# EAGLE board Platine (EAGLE 6.6.0)
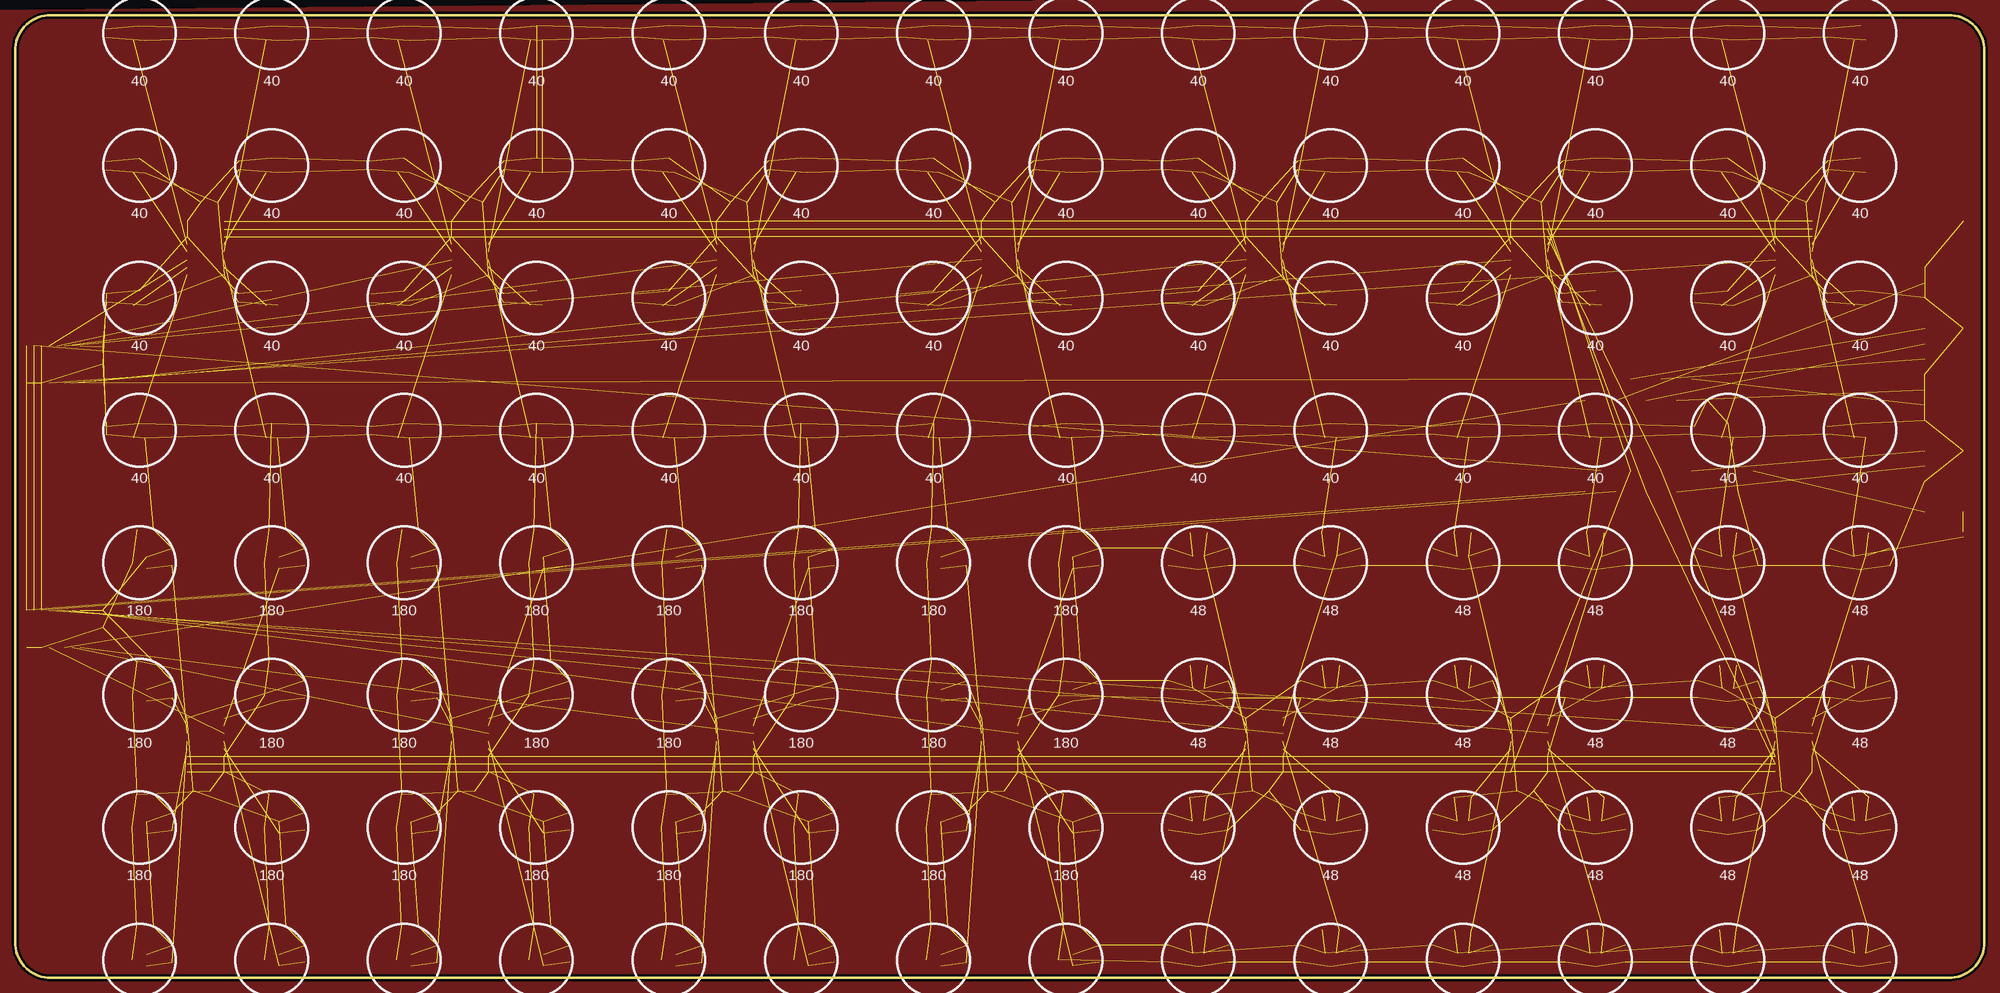
[diagram p0: board, top side]
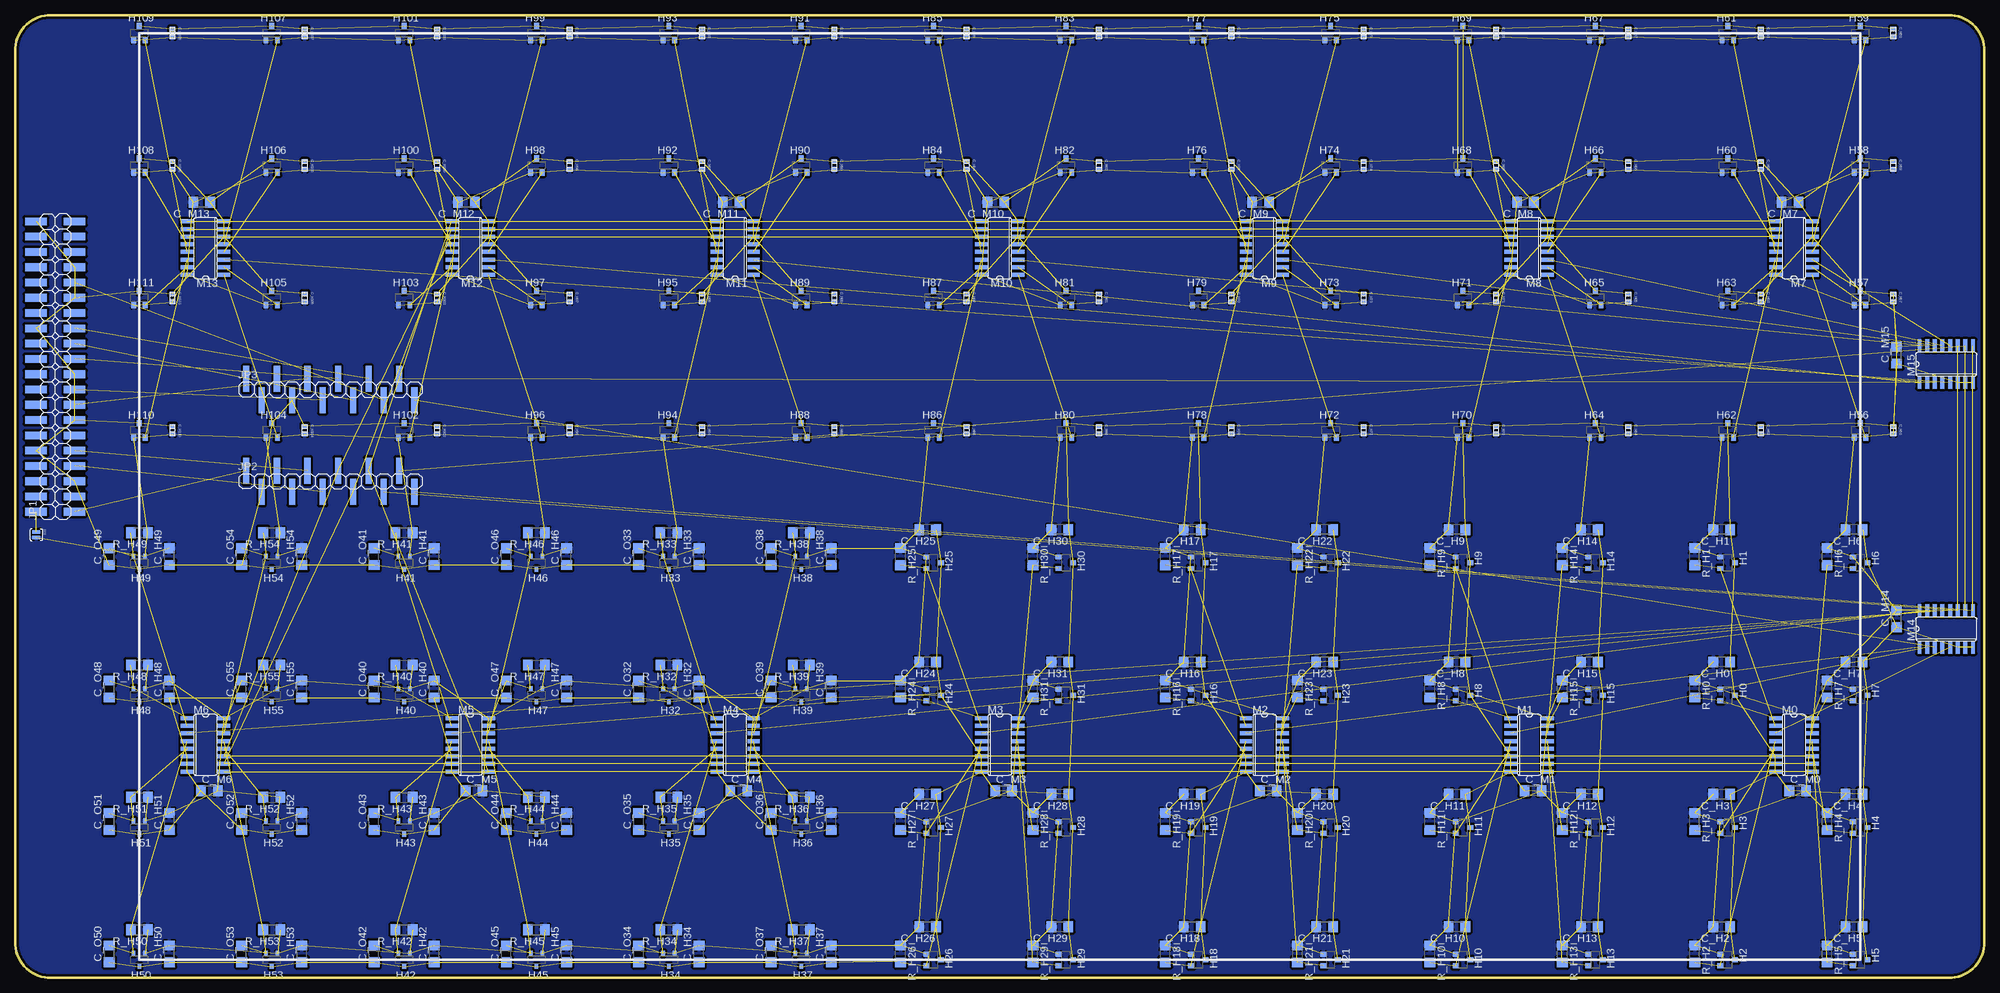
[diagram p1: board, bottom side, seen from below]

Size 327.37 x 160.02 mm. Coordinates in mm from the lower left corner, seen from the top.
Outline: 0,6 0,154.02 arc-90 6,160.02 321.37,160.02 arc-90 327.37,154.02 327.37,6 arc-90 321.37,0 6,0 arc-90 0,6
Copper layers (1*16): Top 0.035mm / dielectric 1.5mm / Bottom 0.035mm
Design rules "NOA Eagle Rule 2016-06-12": minimum track width 6mil, minimum drill 0.3mm, track to track 6mil, track to pad 6mil, pad to pad 6mil, via to via 6mil, smd to smd 0mil, copper to edge 0.4mm, drill to drill 10mil, minimum pad ring 10mil, minimum via ring 6mil, stop-mask expansion 2mil, vias tented up to drill 25mil, thermal gap 10mil
Net classes: 0 default: width 0.406 mm, clearance 0.178 mm

## Footprints (pad centres in the part's own frame; a part is rotated, then mirrored left to right if it is on the bottom)
C1206 = smd 1.6 x 1.8: 1 -1.4,0; 2 1.4,0
0603 = smd 0.66 x 0.965: 1 -0.699,0; 2 0.699,0
SC59 = smd 0.8 x 1: 1 -0.95,-1.2; 2 0,1.2; 3 0.95,-1.2
SOT23@1 = smd 0.6 x 0.8: 1 -0.95,-1.1; 2 0.95,-1.1; 3 0,1.1
SOT23F = smd 0.8 x 1: 1 -0.95,-1.2; 2 0.95,-1.2; 3 0,1.2
2X20SMD = smd 1.27 x 3.6: 1 0,-3.2; 2 0,3.2; 3 2.54,-3.2; 4 2.54,3.2; 5 5.08,-3.2; 6 5.08,3.2; 7 7.62,-3.2; 8 7.62,3.2; 9 10.16,-3.2; 10 10.16,3.2; 11 12.7,-3.2; 12 12.7,3.2; 13 15.24,-3.2; 14 15.24,3.2; 15 17.78,-3.2; 16 17.78,3.2; 17 20.32,-3.2; 18 20.32,3.2; 19 22.86,-3.2; 20 22.86,3.2; 21 25.4,-3.2; 22 25.4,3.2; 23 27.94,-3.2; 24 27.94,3.2; 25 30.48,-3.2; 26 30.48,3.2; 27 33.02,-3.2; 28 33.02,3.2; 29 35.56,-3.2; 30 35.56,3.2; 31 38.1,-3.2; 32 38.1,3.2; 33 40.64,-3.2; 34 40.64,3.2; 35 43.18,-3.2; 36 43.18,3.2; 37 45.72,-3.2; 38 45.72,3.2; 39 48.26,-3.2; 40 48.26,3.2
1X12SMD = smd 1.016 x 4.318: 1 -1.27,1.778; 2 1.27,-1.778; 3 3.81,1.778; 4 6.35,-1.778; 5 8.89,1.778; 6 11.43,-1.778; 7 13.97,1.778; 8 16.51,-1.778; 9 19.05,1.778; 10 21.59,-1.778; 11 24.13,1.778; 12 26.67,-1.778
SO16 = smd 0.66 x 2.032: 1 -4.445,-3.073; 2 -3.175,-3.073; 3 -1.905,-3.073; 4 -0.635,-3.073; 5 0.635,-3.073; 6 1.905,-3.073; 7 3.175,-3.073; 8 4.445,-3.073; 9 4.445,3.073; 10 3.175,3.073; 11 1.905,3.073; 12 0.635,3.073; 13 -0.635,3.073; 14 -1.905,3.073; 15 -3.175,3.073; 16 -4.445,3.073
R1206 = smd 1.6 x 1.803: 1 -1.422,0; 2 1.422,0
SJ_2S-NO = smd 0.635 x 1.27: 1 -0.45,0; 2 0.45,0

## Placement (x,y rotation side)
C_H0  100n  [C1206]  43.67,52.51 180 bottom
C_H1  100n  [C1206]  43.67,74.51 180 bottom
C_H2  100n  [C1206]  43.67,8.5 180 bottom
C_H3  100n  [C1206]  43.67,30.5 180 bottom
C_H4  100n  [C1206]  21.67,30.5 180 bottom
C_H5  100n  [C1206]  21.67,8.5 180 bottom
C_H6  100n  [C1206]  21.67,74.51 180 bottom
C_H7  100n  [C1206]  21.67,52.51 180 bottom
C_H8  100n  [C1206]  87.67,52.51 180 bottom
C_H9  100n  [C1206]  87.67,74.51 180 bottom
C_H10  100n  [C1206]  87.67,8.5 180 bottom
C_H11  100n  [C1206]  87.67,30.5 180 bottom
C_H12  100n  [C1206]  65.67,30.5 180 bottom
C_H13  100n  [C1206]  65.67,8.5 180 bottom
C_H14  100n  [C1206]  65.67,74.51 180 bottom
C_H15  100n  [C1206]  65.67,52.51 180 bottom
C_H16  100n  [C1206]  131.68,52.51 180 bottom
C_H17  100n  [C1206]  131.68,74.51 180 bottom
C_H18  100n  [C1206]  131.68,8.5 180 bottom
C_H19  100n  [C1206]  131.68,30.5 180 bottom
C_H20  100n  [C1206]  109.68,30.5 180 bottom
C_H21  100n  [C1206]  109.68,8.5 180 bottom
C_H22  100n  [C1206]  109.68,74.51 180 bottom
C_H23  100n  [C1206]  109.68,52.51 180 bottom
C_H24  100n  [C1206]  175.69,52.51 180 bottom
C_H25  100n  [C1206]  175.69,74.51 180 bottom
C_H26  100n  [C1206]  175.69,8.5 180 bottom
C_H27  100n  [C1206]  175.69,30.5 180 bottom
C_H28  100n  [C1206]  153.68,30.5 180 bottom
C_H29  100n  [C1206]  153.68,8.5 180 bottom
C_H30  100n  [C1206]  153.68,74.51 180 bottom
C_H31  100n  [C1206]  153.68,52.51 180 bottom
C_H32  10n  [C1206]  213.69,48.01 90 bottom
C_H33  10n  [C1206]  213.69,70.01 90 bottom
C_H34  10n  [C1206]  213.69,4 90 bottom
C_H35  10n  [C1206]  213.69,26 90 bottom
C_H36  10n  [C1206]  191.69,26 90 bottom
C_H37  10n  [C1206]  191.69,4 90 bottom
C_H38  10n  [C1206]  191.69,70.01 90 bottom
C_H39  10n  [C1206]  191.69,48.01 90 bottom
C_H40  10n  [C1206]  257.7,48.01 90 bottom
C_H41  10n  [C1206]  257.7,70.01 90 bottom
C_H42  10n  [C1206]  257.7,4 90 bottom
C_H43  10n  [C1206]  257.7,26 90 bottom
C_H44  10n  [C1206]  235.69,26 90 bottom
C_H45  10n  [C1206]  235.69,4 90 bottom
C_H46  10n  [C1206]  235.69,70.01 90 bottom
C_H47  10n  [C1206]  235.69,48.01 90 bottom
C_H48  10n  [C1206]  301.7,48.01 90 bottom
C_H49  10n  [C1206]  301.7,70.01 90 bottom
C_H50  10n  [C1206]  301.7,4 90 bottom
C_H51  10n  [C1206]  301.7,26 90 bottom
C_H52  10n  [C1206]  279.7,26 90 bottom
C_H53  10n  [C1206]  279.7,4 90 bottom
C_H54  10n  [C1206]  279.7,70.01 90 bottom
C_H55  10n  [C1206]  279.7,48.01 90 bottom
C_H56  0.47uF  [0603]  15.17,91.01 270 bottom
C_H57  0.47uF  [0603]  15.17,113.01 270 bottom
C_H58  0.47uF  [0603]  15.17,135.02 270 bottom
C_H59  0.47uF  [0603]  15.17,157.02 270 bottom
C_H60  0.47uF  [0603]  37.17,135.02 270 bottom
C_H61  0.47uF  [0603]  37.17,157.02 270 bottom
C_H62  0.47uF  [0603]  37.17,91.01 270 bottom
C_H63  0.47uF  [0603]  37.17,113.01 270 bottom
C_H64  0.47uF  [0603]  59.17,91.01 270 bottom
C_H65  0.47uF  [0603]  59.17,113.01 270 bottom
C_H66  0.47uF  [0603]  59.17,135.02 270 bottom
C_H67  0.47uF  [0603]  59.17,157.02 270 bottom
C_H68  0.47uF  [0603]  81.17,135.02 270 bottom
C_H69  0.47uF  [0603]  81.17,157.02 270 bottom
C_H70  0.47uF  [0603]  81.17,91.01 270 bottom
C_H71  0.47uF  [0603]  81.17,113.01 270 bottom
C_H72  0.47uF  [0603]  103.18,91.01 270 bottom
C_H73  0.47uF  [0603]  103.18,113.01 270 bottom
C_H74  0.47uF  [0603]  103.18,135.02 270 bottom
C_H75  0.47uF  [0603]  103.18,157.02 270 bottom
C_H76  0.47uF  [0603]  125.18,135.02 270 bottom
C_H77  0.47uF  [0603]  125.18,157.02 270 bottom
C_H78  0.47uF  [0603]  125.18,91.01 270 bottom
C_H79  0.47uF  [0603]  125.18,113.01 270 bottom
C_H80  0.47uF  [0603]  147.18,91.01 270 bottom
C_H81  0.47uF  [0603]  147.18,113.01 270 bottom
C_H82  0.47uF  [0603]  147.18,135.02 270 bottom
C_H83  0.47uF  [0603]  147.18,157.02 270 bottom
C_H84  0.47uF  [0603]  169.19,135.02 270 bottom
C_H85  0.47uF  [0603]  169.19,157.02 270 bottom
C_H86  0.47uF  [0603]  169.19,91.01 270 bottom
C_H87  0.47uF  [0603]  169.19,113.01 270 bottom
C_H88  0.47uF  [0603]  191.19,91.01 270 bottom
C_H89  0.47uF  [0603]  191.19,113.01 270 bottom
C_H90  0.47uF  [0603]  191.19,135.02 270 bottom
C_H91  0.47uF  [0603]  191.19,157.02 270 bottom
C_H92  0.47uF  [0603]  213.19,135.02 270 bottom
C_H93  0.47uF  [0603]  213.19,157.02 270 bottom
C_H94  0.47uF  [0603]  213.19,91.01 270 bottom
C_H95  0.47uF  [0603]  213.19,113.01 270 bottom
C_H96  0.47uF  [0603]  235.19,91.01 270 bottom
C_H97  0.47uF  [0603]  235.19,113.01 270 bottom
C_H98  0.47uF  [0603]  235.19,135.02 270 bottom
C_H99  0.47uF  [0603]  235.19,157.02 270 bottom
C_H100  0.47uF  [0603]  257.2,135.02 270 bottom
C_H101  0.47uF  [0603]  257.2,157.02 270 bottom
C_H102  0.47uF  [0603]  257.2,91.01 270 bottom
C_H103  0.47uF  [0603]  257.2,113.01 270 bottom
C_H104  0.47uF  [0603]  279.2,91.01 270 bottom
C_H105  0.47uF  [0603]  279.2,113.01 270 bottom
C_H106  0.47uF  [0603]  279.2,135.02 270 bottom
C_H107  0.47uF  [0603]  279.2,157.02 270 bottom
C_H108  0.47uF  [0603]  301.2,135.02 270 bottom
C_H109  0.47uF  [0603]  301.2,157.02 270 bottom
C_H110  0.47uF  [0603]  301.2,91.01 270 bottom
C_H111  0.47uF  [0603]  301.2,113.01 270 bottom
C_M0  100n  [C1206]  31.03,31.11 0 bottom
C_M1  100n  [C1206]  75.04,31.11 0 bottom
C_M2  100n  [C1206]  119.04,31.11 0 bottom
C_M3  100n  [C1206]  163.05,31.11 0 bottom
C_M4  100n  [C1206]  207.06,31.11 0 bottom
C_M5  100n  [C1206]  251.06,31.11 0 bottom
C_M6  100n  [C1206]  295.07,31.11 0 bottom
C_M7  100n  [C1206]  32.3,128.91 180 bottom
C_M8  100n  [C1206]  76.31,128.91 180 bottom
C_M9  100n  [C1206]  120.31,128.91 180 bottom
C_M10  100n  [C1206]  164.32,128.91 180 bottom
C_M11  100n  [C1206]  208.33,128.91 180 bottom
C_M12  100n  [C1206]  252.33,128.91 180 bottom
C_M13  100n  [C1206]  296.34,128.91 180 bottom
C_M14  100n  [C1206]  14.61,59.69 90 bottom
C_M15  100n  [C1206]  14.61,103.5 90 bottom
C_O32  100p  [C1206]  223.69,48.01 90 bottom
C_O33  100p  [C1206]  223.69,70.01 90 bottom
C_O34  100p  [C1206]  223.69,4 90 bottom
C_O35  100p  [C1206]  223.69,26 90 bottom
C_O36  100p  [C1206]  201.69,26 90 bottom
C_O37  100p  [C1206]  201.69,4 90 bottom
C_O38  100p  [C1206]  201.69,70.01 90 bottom
C_O39  100p  [C1206]  201.69,48.01 90 bottom
C_O40  100p  [C1206]  267.7,48.01 90 bottom
C_O41  100p  [C1206]  267.7,70.01 90 bottom
C_O42  100p  [C1206]  267.7,4 90 bottom
C_O43  100p  [C1206]  267.7,26 90 bottom
C_O44  100p  [C1206]  245.69,26 90 bottom
C_O45  100p  [C1206]  245.69,4 90 bottom
C_O46  100p  [C1206]  245.69,70.01 90 bottom
C_O47  100p  [C1206]  245.69,48.01 90 bottom
C_O48  100p  [C1206]  311.7,48.01 90 bottom
C_O49  100p  [C1206]  311.7,70.01 90 bottom
C_O50  100p  [C1206]  311.7,4 90 bottom
C_O51  100p  [C1206]  311.7,26 90 bottom
C_O52  100p  [C1206]  289.7,26 90 bottom
C_O53  100p  [C1206]  289.7,4 90 bottom
C_O54  100p  [C1206]  289.7,70.01 90 bottom
C_O55  100p  [C1206]  289.7,48.01 90 bottom
H0  AH180N  [SC59]  42.67,47.01 270 bottom
H1  AH180N  [SC59]  42.67,69.01 270 bottom
H2  AH180N  [SC59]  42.67,3 270 bottom
H3  AH180N  [SC59]  42.67,25 270 bottom
H4  AH180N  [SC59]  20.67,25 270 bottom
H5  AH180N  [SC59]  20.67,3 270 bottom
H6  AH180N  [SC59]  20.67,69.01 270 bottom
H7  AH180N  [SC59]  20.67,47.01 270 bottom
H8  AH180N  [SC59]  86.67,47.01 270 bottom
H9  AH180N  [SC59]  86.67,69.01 270 bottom
H10  AH180N  [SC59]  86.67,3 270 bottom
H11  AH180N  [SC59]  86.67,25 270 bottom
H12  AH180N  [SC59]  64.67,25 270 bottom
H13  AH180N  [SC59]  64.67,3 270 bottom
H14  AH180N  [SC59]  64.67,69.01 270 bottom
H15  AH180N  [SC59]  64.67,47.01 270 bottom
H16  AH180N  [SC59]  130.68,47.01 270 bottom
H17  AH180N  [SC59]  130.68,69.01 270 bottom
H18  AH180N  [SC59]  130.68,3 270 bottom
H19  AH180N  [SC59]  130.68,25 270 bottom
H20  AH180N  [SC59]  108.68,25 270 bottom
H21  AH180N  [SC59]  108.68,3 270 bottom
H22  AH180N  [SC59]  108.68,69.01 270 bottom
H23  AH180N  [SC59]  108.68,47.01 270 bottom
H24  AH180N  [SC59]  174.69,47.01 270 bottom
H25  AH180N  [SC59]  174.69,69.01 270 bottom
H26  AH180N  [SC59]  174.69,3 270 bottom
H27  AH180N  [SC59]  174.69,25 270 bottom
H28  AH180N  [SC59]  152.68,25 270 bottom
H29  AH180N  [SC59]  152.68,3 270 bottom
H30  AH180N  [SC59]  152.68,69.01 270 bottom
H31  AH180N  [SC59]  152.68,47.01 270 bottom
H32  AH9248  [SOT23@1]  218.69,47.01 180 bottom
H33  AH9248  [SOT23@1]  218.69,69.01 180 bottom
H34  AH9248  [SOT23@1]  218.69,3 180 bottom
H35  AH9248  [SOT23@1]  218.69,25 180 bottom
H36  AH9248  [SOT23@1]  196.69,25 180 bottom
H37  AH9248  [SOT23@1]  196.69,3 180 bottom
H38  AH9248  [SOT23@1]  196.69,69.01 180 bottom
H39  AH9248  [SOT23@1]  196.69,47.01 180 bottom
H40  AH9248  [SOT23@1]  262.7,47.01 180 bottom
H41  AH9248  [SOT23@1]  262.7,69.01 180 bottom
H42  AH9248  [SOT23@1]  262.7,3 180 bottom
H43  AH9248  [SOT23@1]  262.7,25 180 bottom
H44  AH9248  [SOT23@1]  240.69,25 180 bottom
H45  AH9248  [SOT23@1]  240.69,3 180 bottom
H46  AH9248  [SOT23@1]  240.69,69.01 180 bottom
H47  AH9248  [SOT23@1]  240.69,47.01 180 bottom
H48  AH9248  [SOT23@1]  306.7,47.01 180 bottom
H49  AH9248  [SOT23@1]  306.7,69.01 180 bottom
H50  AH9248  [SOT23@1]  306.7,3 180 bottom
H51  AH9248  [SOT23@1]  306.7,25 180 bottom
H52  AH9248  [SOT23@1]  284.7,25 180 bottom
H53  AH9248  [SOT23@1]  284.7,3 180 bottom
H54  AH9248  [SOT23@1]  284.7,69.01 180 bottom
H55  AH9248  [SOT23@1]  284.7,47.01 180 bottom
H56  TCS40DPR,LF  [SOT23F]  20.67,91.01 0 bottom
H57  TCS40DPR,LF  [SOT23F]  20.67,113.01 0 bottom
H58  TCS40DPR,LF  [SOT23F]  20.67,135.02 0 bottom
H59  TCS40DPR,LF  [SOT23F]  20.67,157.02 0 bottom
H60  TCS40DPR,LF  [SOT23F]  42.67,135.02 0 bottom
H61  TCS40DPR,LF  [SOT23F]  42.67,157.02 0 bottom
H62  TCS40DPR,LF  [SOT23F]  42.67,91.01 0 bottom
H63  TCS40DPR,LF  [SOT23F]  42.67,113.01 0 bottom
H64  TCS40DPR,LF  [SOT23F]  64.67,91.01 0 bottom
H65  TCS40DPR,LF  [SOT23F]  64.67,113.01 0 bottom
H66  TCS40DPR,LF  [SOT23F]  64.67,135.02 0 bottom
H67  TCS40DPR,LF  [SOT23F]  64.67,157.02 0 bottom
H68  TCS40DPR,LF  [SOT23F]  86.67,135.02 0 bottom
H69  TCS40DPR,LF  [SOT23F]  86.67,157.02 0 bottom
H70  TCS40DPR,LF  [SOT23F]  86.67,91.01 0 bottom
H71  TCS40DPR,LF  [SOT23F]  86.67,113.01 0 bottom
H72  TCS40DPR,LF  [SOT23F]  108.68,91.01 0 bottom
H73  TCS40DPR,LF  [SOT23F]  108.68,113.01 0 bottom
H74  TCS40DPR,LF  [SOT23F]  108.68,135.02 0 bottom
H75  TCS40DPR,LF  [SOT23F]  108.68,157.02 0 bottom
H76  TCS40DPR,LF  [SOT23F]  130.68,135.02 0 bottom
H77  TCS40DPR,LF  [SOT23F]  130.68,157.02 0 bottom
H78  TCS40DPR,LF  [SOT23F]  130.68,91.01 0 bottom
H79  TCS40DPR,LF  [SOT23F]  130.68,113.01 0 bottom
H80  TCS40DPR,LF  [SOT23F]  152.68,91.01 0 bottom
H81  TCS40DPR,LF  [SOT23F]  152.68,113.01 0 bottom
H82  TCS40DPR,LF  [SOT23F]  152.68,135.02 0 bottom
H83  TCS40DPR,LF  [SOT23F]  152.68,157.02 0 bottom
H84  TCS40DPR,LF  [SOT23F]  174.69,135.02 0 bottom
H85  TCS40DPR,LF  [SOT23F]  174.69,157.02 0 bottom
H86  TCS40DPR,LF  [SOT23F]  174.69,91.01 0 bottom
H87  TCS40DPR,LF  [SOT23F]  174.69,113.01 0 bottom
H88  TCS40DPR,LF  [SOT23F]  196.69,91.01 0 bottom
H89  TCS40DPR,LF  [SOT23F]  196.69,113.01 0 bottom
H90  TCS40DPR,LF  [SOT23F]  196.69,135.02 0 bottom
H91  TCS40DPR,LF  [SOT23F]  196.69,157.02 0 bottom
H92  TCS40DPR,LF  [SOT23F]  218.69,135.02 0 bottom
H93  TCS40DPR,LF  [SOT23F]  218.69,157.02 0 bottom
H94  TCS40DPR,LF  [SOT23F]  218.69,91.01 0 bottom
H95  TCS40DPR,LF  [SOT23F]  218.69,113.01 0 bottom
H96  TCS40DPR,LF  [SOT23F]  240.69,91.01 0 bottom
H97  TCS40DPR,LF  [SOT23F]  240.69,113.01 0 bottom
H98  TCS40DPR,LF  [SOT23F]  240.69,135.02 0 bottom
H99  TCS40DPR,LF  [SOT23F]  240.69,157.02 0 bottom
H100  TCS40DPR,LF  [SOT23F]  262.7,135.02 0 bottom
H101  TCS40DPR,LF  [SOT23F]  262.7,157.02 0 bottom
H102  TCS40DPR,LF  [SOT23F]  262.7,91.01 0 bottom
H103  TCS40DPR,LF  [SOT23F]  262.7,113.01 0 bottom
H104  TCS40DPR,LF  [SOT23F]  284.7,91.01 0 bottom
H105  TCS40DPR,LF  [SOT23F]  284.7,113.01 0 bottom
H106  TCS40DPR,LF  [SOT23F]  284.7,135.02 0 bottom
H107  TCS40DPR,LF  [SOT23F]  284.7,157.02 0 bottom
H108  TCS40DPR,LF  [SOT23F]  306.7,135.02 0 bottom
H109  TCS40DPR,LF  [SOT23F]  306.7,157.02 0 bottom
H110  TCS40DPR,LF  [SOT23F]  306.7,91.01 0 bottom
H111  TCS40DPR,LF  [SOT23F]  306.7,113.01 0 bottom
JP1  [2X20SMD]  320.68,77.47 90 bottom
JP2  [1X12SMD]  287.65,82.55 0 bottom
JP3  [1X12SMD]  287.65,97.79 0 bottom
M0  MC14051B  [SO16]  31.67,38.73 270 bottom
M1  MC14051B  [SO16]  75.67,38.73 270 bottom
M2  MC14051B  [SO16]  119.68,38.73 270 bottom
M3  MC14051B  [SO16]  163.69,38.73 270 bottom
M4  MC14051B  [SO16]  207.69,38.73 270 bottom
M5  MC14051B  [SO16]  251.7,38.73 270 bottom
M6  MC14051B  [SO16]  295.7,38.73 270 bottom
M7  MC14051B  [SO16]  31.67,121.28 90 bottom
M8  MC14051B  [SO16]  75.67,121.28 90 bottom
M9  MC14051B  [SO16]  119.68,121.28 90 bottom
M10  MC14051B  [SO16]  163.69,121.28 90 bottom
M11  MC14051B  [SO16]  207.69,121.28 90 bottom
M12  MC14051B  [SO16]  251.7,121.28 90 bottom
M13  MC14051B  [SO16]  295.7,121.28 90 bottom
M14  MC14051B  [SO16]  6.35,58.01 0 bottom
M15  MC14051B  [SO16]  6.35,102.01 0 bottom
R_H0  100k  [R1206]  48.17,48.01 270 bottom
R_H1  100k  [R1206]  48.17,70.01 270 bottom
R_H2  100k  [R1206]  48.17,4 270 bottom
R_H3  100k  [R1206]  48.17,26 270 bottom
R_H4  100k  [R1206]  26.17,26 270 bottom
R_H5  100k  [R1206]  26.17,4 270 bottom
R_H6  100k  [R1206]  26.17,70.01 270 bottom
R_H7  100k  [R1206]  26.17,48.01 270 bottom
R_H8  100k  [R1206]  92.17,48.01 270 bottom
R_H9  100k  [R1206]  92.17,70.01 270 bottom
R_H10  100k  [R1206]  92.17,4 270 bottom
R_H11  100k  [R1206]  92.17,26 270 bottom
R_H12  100k  [R1206]  70.17,26 270 bottom
R_H13  100k  [R1206]  70.17,4 270 bottom
R_H14  100k  [R1206]  70.17,70.01 270 bottom
R_H15  100k  [R1206]  70.17,48.01 270 bottom
R_H16  100k  [R1206]  136.18,48.01 270 bottom
R_H17  100k  [R1206]  136.18,70.01 270 bottom
R_H18  100k  [R1206]  136.18,4 270 bottom
R_H19  100k  [R1206]  136.18,26 270 bottom
R_H20  100k  [R1206]  114.18,26 270 bottom
R_H21  100k  [R1206]  114.18,4 270 bottom
R_H22  100k  [R1206]  114.18,70.01 270 bottom
R_H23  100k  [R1206]  114.18,48.01 270 bottom
R_H24  100k  [R1206]  180.19,48.01 270 bottom
R_H25  100k  [R1206]  180.19,70.01 270 bottom
R_H26  100k  [R1206]  180.19,4 270 bottom
R_H27  100k  [R1206]  180.19,26 270 bottom
R_H28  100k  [R1206]  158.18,26 270 bottom
R_H29  100k  [R1206]  158.18,4 270 bottom
R_H30  100k  [R1206]  158.18,70.01 270 bottom
R_H31  100k  [R1206]  158.18,48.01 270 bottom
R_H32  100k  [R1206]  218.69,52.01 180 bottom
R_H33  100k  [R1206]  218.69,74.01 180 bottom
R_H34  100k  [R1206]  218.69,8 180 bottom
R_H35  100k  [R1206]  218.69,30 180 bottom
R_H36  100k  [R1206]  196.69,30 180 bottom
R_H37  100k  [R1206]  196.69,8 180 bottom
R_H38  100k  [R1206]  196.69,74.01 180 bottom
R_H39  100k  [R1206]  196.69,52.01 180 bottom
R_H40  100k  [R1206]  262.7,52.01 180 bottom
R_H41  100k  [R1206]  262.7,74.01 180 bottom
R_H42  100k  [R1206]  262.7,8 180 bottom
R_H43  100k  [R1206]  262.7,30 180 bottom
R_H44  100k  [R1206]  240.69,30 180 bottom
R_H45  100k  [R1206]  240.69,8 180 bottom
R_H46  100k  [R1206]  240.69,74.01 180 bottom
R_H47  100k  [R1206]  240.69,52.01 180 bottom
R_H48  100k  [R1206]  306.7,52.01 180 bottom
R_H49  100k  [R1206]  306.7,74.01 180 bottom
R_H50  100k  [R1206]  306.7,8 180 bottom
R_H51  100k  [R1206]  306.7,30 180 bottom
R_H52  100k  [R1206]  284.7,30 180 bottom
R_H53  100k  [R1206]  284.7,8 180 bottom
R_H54  100k  [R1206]  284.7,74.01 180 bottom
R_H55  100k  [R1206]  284.7,52.01 180 bottom
SJ1  [SJ_2S-NO]  323.85,73.66 270 bottom

## Library data of the parts
C_H0 C_H1-C_H55 C_M0 C_M1-C_M15 C_O32-C_O55 R_H0 R_H1-R_H55 = rcl
C_H56-C_H111 = myLibrary; DESCRIPTION: Kondensator aus mehreren Keramikschichten MLCC - SMD/SMT 0603 0.47uF 16volts X7R 10%; PART_NUMBER: GCM188R71C474KA55D
H0 H1-H31 = myLibrary; PART_NUMBER: AH180N-WG-7
H32-H55 = myLibrary; PART_NUMBER: AH9248NTR-G1
H56-H111 = myLibrary; DESCRIPTION: Halleffekt-/Magnetsensoren für Plattenmontage Magnetic Sensor Push Pull Dual Detection; PART_NUMBER: TCS40DPR,LF
JP1 = myLibrary
JP2 JP3 = pinhead2
M0 M1-M15 = myLibrary; PART_NUMBER: CD4051BM
SJ1 = SparkFun

## Nets
5V: JP1.1 JP2.1
+3V3: C_H0.2 C_H1.2 C_H2.2 C_H3.2 C_H4.2 C_H5.2 C_H6.2 C_H7.2 C_H8.2 C_H9.2 C_H10.2 C_H11.2 C_H12.2 C_H13.2 C_H14.2 C_H15.2 C_H16.2 C_H17.2 C_H18.2 C_H19.2 C_H20.2 C_H21.2 C_H22.2 C_H23.2 C_H24.2 C_H25.2 C_H26.2 C_H27.2 C_H28.2 C_H29.2 C_H30.2 C_H31.2 C_H32.2 C_H33.2 C_H34.2 C_H35.2 C_H36.2 C_H37.2 C_H38.2 C_H39.2 C_H40.2 C_H41.2 C_H42.2 C_H43.2 C_H44.2 C_H45.2 C_H46.2 C_H47.2 C_H48.2 C_H49.2 C_H50.2 C_H51.2 C_H52.2 C_H53.2 C_H54.2 C_H55.2 C_H56.2 C_H57.2 C_H58.2 C_H59.2 C_H60.2 C_H61.2 C_H62.2 C_H63.2 C_H64.2 C_H65.2 C_H66.2 C_H67.2 C_H68.2 C_H69.2 C_H70.2 C_H71.2 C_H72.2 C_H73.2 C_H74.2 C_H75.2 C_H76.2 C_H77.2 C_H78.2 C_H79.2 C_H80.2 C_H81.2 C_H82.2 C_H83.2 C_H84.2 C_H85.2 C_H86.2 C_H87.2 C_H88.2 C_H89.2 C_H90.2 C_H91.2 C_H92.2 C_H93.2 C_H94.2 C_H95.2 C_H96.2 C_H97.2 C_H98.2 C_H99.2 C_H100.2 C_H101.2 C_H102.2 C_H103.2 C_H104.2 C_H105.2 C_H106.2 C_H107.2 C_H108.2 C_H109.2 C_H110.2 C_H111.2 C_M0.2 C_M1.2 C_M2.2 C_M3.2 C_M4.2 C_M5.2 C_M6.2 C_M7.2 C_M8.2 C_M9.2 C_M10.2 C_M11.2 C_M12.2 C_M13.2 C_M14.2 C_M15.2 H0.1 H1.1 H2.1 H3.1 H4.1 H5.1 H6.1 H7.1 H8.1 H9.1 H10.1 H11.1 H12.1 H13.1 H14.1 H15.1 H16.1 H17.1 H18.1 H19.1 H20.1 H21.1 H22.1 H23.1 H24.1 H25.1 H26.1 H27.1 H28.1 H29.1 H30.1 H31.1 H32.1 H33.1 H34.1 H35.1 H36.1 H37.1 H38.1 H39.1 H40.1 H41.1 H42.1 H43.1 H44.1 H45.1 H46.1 H47.1 H48.1 H49.1 H50.1 H51.1 H52.1 H53.1 H54.1 H55.1 H56.1 H57.1 H58.1 H59.1 H60.1 H61.1 H62.1 H63.1 H64.1 H65.1 H66.1 H67.1 H68.1 H69.1 H70.1 H71.1 H72.1 H73.1 H74.1 H75.1 H76.1 H77.1 H78.1 H79.1 H80.1 H81.1 H82.1 H83.1 H84.1 H85.1 H86.1 H87.1 H88.1 H89.1 H90.1 H91.1 H92.1 H93.1 H94.1 H95.1 H96.1 H97.1 H98.1 H99.1 H100.1 H101.1 H102.1 H103.1 H104.1 H105.1 H106.1 H107.1 H108.1 H109.1 H110.1 H111.1 M0.16 M1.16 M2.16 M3.16 M4.16 M5.16 M6.16 M7.16 M8.16 M9.16 M10.16 M11.16 M12.16 M13.16 M14.16 M15.16 R_H0.1 R_H1.1 R_H2.1 R_H3.1 R_H4.1 R_H5.1 R_H6.1 R_H7.1 R_H8.1 R_H9.1 R_H10.1 R_H11.1 R_H12.1 R_H13.1 R_H14.1 R_H15.1 R_H16.1 R_H17.1 R_H18.1 R_H19.1 R_H20.1 R_H21.1 R_H22.1 R_H23.1 R_H24.1 R_H25.1 R_H26.1 R_H27.1 R_H28.1 R_H29.1 R_H30.1 R_H31.1 R_H32.1 R_H33.1 R_H34.1 R_H35.1 R_H36.1 R_H37.1 R_H38.1 R_H39.1 R_H40.1 R_H41.1 R_H42.1 R_H43.1 R_H44.1 R_H45.1 R_H46.1 R_H47.1 R_H48.1 R_H49.1 R_H50.1 R_H51.1 R_H52.1 R_H53.1 R_H54.1 R_H55.1 SJ1.2
CONTROL0: JP1.9 JP2.5
CONTROL1: JP1.7 JP2.6
DATA0: JP1.15 JP3.5
DATA1: JP1.17 JP3.6
DATA2: JP1.21 JP3.7
DATA3: JP1.23 JP3.8
DATA4: JP1.25 JP3.9
DATA5: JP1.31 JP3.10
GND: C_H0.1 C_H1.1 C_H2.1 C_H3.1 C_H4.1 C_H5.1 C_H6.1 C_H7.1 C_H8.1 C_H9.1 C_H10.1 C_H11.1 C_H12.1 C_H13.1 C_H14.1 C_H15.1 C_H16.1 C_H17.1 C_H18.1 C_H19.1 C_H20.1 C_H21.1 C_H22.1 C_H23.1 C_H24.1 C_H25.1 C_H26.1 C_H27.1 C_H28.1 C_H29.1 C_H30.1 C_H31.1 C_H32.1 C_H33.1 C_H34.1 C_H35.1 C_H36.1 C_H37.1 C_H38.1 C_H39.1 C_H40.1 C_H41.1 C_H42.1 C_H43.1 C_H44.1 C_H45.1 C_H46.1 C_H47.1 C_H48.1 C_H49.1 C_H50.1 C_H51.1 C_H52.1 C_H53.1 C_H54.1 C_H55.1 C_H56.1 C_H57.1 C_H58.1 C_H59.1 C_H60.1 C_H61.1 C_H62.1 C_H63.1 C_H64.1 C_H65.1 C_H66.1 C_H67.1 C_H68.1 C_H69.1 C_H70.1 C_H71.1 C_H72.1 C_H73.1 C_H74.1 C_H75.1 C_H76.1 C_H77.1 C_H78.1 C_H79.1 C_H80.1 C_H81.1 C_H82.1 C_H83.1 C_H84.1 C_H85.1 C_H86.1 C_H87.1 C_H88.1 C_H89.1 C_H90.1 C_H91.1 C_H92.1 C_H93.1 C_H94.1 C_H95.1 C_H96.1 C_H97.1 C_H98.1 C_H99.1 C_H100.1 C_H101.1 C_H102.1 C_H103.1 C_H104.1 C_H105.1 C_H106.1 C_H107.1 C_H108.1 C_H109.1 C_H110.1 C_H111.1 C_M0.1 C_M1.1 C_M2.1 C_M3.1 C_M4.1 C_M5.1 C_M6.1 C_M7.1 C_M8.1 C_M9.1 C_M10.1 C_M11.1 C_M12.1 C_M13.1 C_M14.1 C_M15.1 C_O32.1 C_O33.1 C_O34.1 C_O35.1 C_O36.1 C_O37.1 C_O38.1 C_O39.1 C_O40.1 C_O41.1 C_O42.1 C_O43.1 C_O44.1 C_O45.1 C_O46.1 C_O47.1 C_O48.1 C_O49.1 C_O50.1 C_O51.1 C_O52.1 C_O53.1 C_O54.1 C_O55.1 H0.2 H1.2 H2.2 H3.2 H4.2 H5.2 H6.2 H7.2 H8.2 H9.2 H10.2 H11.2 H12.2 H13.2 H14.2 H15.2 H16.2 H17.2 H18.2 H19.2 H20.2 H21.2 H22.2 H23.2 H24.2 H25.2 H26.2 H27.2 H28.2 H29.2 H30.2 H31.2 H32.3 H33.3 H34.3 H35.3 H36.3 H37.3 H38.3 H39.3 H40.3 H41.3 H42.3 H43.3 H44.3 H45.3 H46.3 H47.3 H48.3 H49.3 H50.3 H51.3 H52.3 H53.3 H54.3 H55.3 H56.3 H57.3 H58.3 H59.3 H60.3 H61.3 H62.3 H63.3 H64.3 H65.3 H66.3 H67.3 H68.3 H69.3 H70.3 H71.3 H72.3 H73.3 H74.3 H75.3 H76.3 H77.3 H78.3 H79.3 H80.3 H81.3 H82.3 H83.3 H84.3 H85.3 H86.3 H87.3 H88.3 H89.3 H90.3 H91.3 H92.3 H93.3 H94.3 H95.3 H96.3 H97.3 H98.3 H99.3 H100.3 H101.3 H102.3 H103.3 H104.3 H105.3 H106.3 H107.3 H108.3 H109.3 H110.3 H111.3 JP1.5 JP1.10 JP1.13 JP1.19 JP1.26 JP1.29 JP1.33 JP1.40 JP2.2 JP3.4 M0.6 M0.7 M0.8 M1.6 M1.7 M1.8 M2.6 M2.7 M2.8 M3.6 M3.7 M3.8 M4.6 M4.7 M4.8 M5.6 M5.7 M5.8 M6.6 M6.7 M6.8 M7.6 M7.7 M7.8 M8.6 M8.7 M8.8 M9.6 M9.7 M9.8 M10.6 M10.7 M10.8 M11.6 M11.7 M11.8 M12.6 M12.7 M12.8 M13.6 M13.7 M13.8 M14.6 M14.7 M14.8 M15.6 M15.7 M15.8
M0: M0.3 M14.5
M1: M1.3 M14.2
M2: M2.3 M14.1
M3: M3.3 M14.15
M4: M4.3 M14.14
M5: M5.3 M14.13
M6: M6.3 M14.12
M7: M7.3 M15.12
M8: M8.3 M15.13
M9: M9.3 M15.14
M10: M10.3 M15.15
M11: M11.3 M15.1
M12: M12.3 M15.2
M13: M13.3 M15.5
M14: JP3.12 M14.3
M15: JP3.11 M15.3
MESS0: H0.3 M0.1 R_H0.2
MESS1: H1.3 M0.2 R_H1.2
MESS2: H2.3 M0.4 R_H2.2
MESS3: H3.3 M0.5 R_H3.2
MESS4: H4.3 M0.12 R_H4.2
MESS5: H5.3 M0.13 R_H5.2
MESS6: H6.3 M0.14 R_H6.2
MESS7: H7.3 M0.15 R_H7.2
MESS8: H8.3 M1.1 R_H8.2
MESS9: H9.3 M1.2 R_H9.2
MESS10: H10.3 M1.4 R_H10.2
MESS11: H11.3 M1.5 R_H11.2
MESS12: H12.3 M1.12 R_H12.2
MESS13: H13.3 M1.13 R_H13.2
MESS14: H14.3 M1.14 R_H14.2
MESS15: H15.3 M1.15 R_H15.2
MESS16: H16.3 M2.1 R_H16.2
MESS17: H17.3 M2.2 R_H17.2
MESS18: H18.3 M2.4 R_H18.2
MESS19: H19.3 M2.5 R_H19.2
MESS20: H20.3 M2.12 R_H20.2
MESS21: H21.3 M2.13 R_H21.2
MESS22: H22.3 M2.14 R_H22.2
MESS23: H23.3 M2.15 R_H23.2
MESS24: H24.3 M3.1 R_H24.2
MESS25: H25.3 M3.2 R_H25.2
MESS26: H26.3 M3.4 R_H26.2
MESS27: H27.3 M3.5 R_H27.2
MESS28: H28.3 M3.12 R_H28.2
MESS29: H29.3 M3.13 R_H29.2
MESS30: H30.3 M3.14 R_H30.2
MESS31: H31.3 M3.15 R_H31.2
MESS32: C_O32.2 H32.2 M4.1 R_H32.2
MESS33: C_O33.2 H33.2 M4.2 R_H33.2
MESS34: C_O34.2 H34.2 M4.4 R_H34.2
MESS35: C_O35.2 H35.2 M4.5 R_H35.2
MESS36: C_O36.2 H36.2 M4.12 R_H36.2
MESS37: C_O37.2 H37.2 M4.13 R_H37.2
MESS38: C_O38.2 H38.2 M4.14 R_H38.2
MESS39: C_O39.2 H39.2 M4.15 R_H39.2
MESS40: C_O40.2 H40.2 M5.1 R_H40.2
MESS41: C_O41.2 H41.2 M5.2 R_H41.2
MESS42: C_O42.2 H42.2 M5.4 R_H42.2
MESS43: C_O43.2 H43.2 M5.5 R_H43.2
MESS44: C_O44.2 H44.2 M5.12 R_H44.2
MESS45: C_O45.2 H45.2 M5.13 R_H45.2
MESS46: C_O46.2 H46.2 M5.14 R_H46.2
MESS47: C_O47.2 H47.2 M5.15 R_H47.2
MESS48: C_O48.2 H48.2 M6.1 R_H48.2
MESS49: C_O49.2 H49.2 M6.2 R_H49.2
MESS50: C_O50.2 H50.2 M6.4 R_H50.2
MESS51: C_O51.2 H51.2 M6.5 R_H51.2
MESS52: C_O52.2 H52.2 M6.12 R_H52.2
MESS53: C_O53.2 H53.2 M6.13 R_H53.2
MESS54: C_O54.2 H54.2 M6.14 R_H54.2
MESS55: C_O55.2 H55.2 M6.15 R_H55.2
MESS56: H56.2 M7.1
MESS57: H57.2 M7.2
MESS58: H58.2 M7.4
MESS59: H59.2 M7.5
MESS60: H60.2 M7.12
MESS61: H61.2 M7.13
MESS62: H62.2 M7.14
MESS63: H63.2 M7.15
MESS64: H64.2 M8.1
MESS65: H65.2 M8.2
MESS66: H66.2 M8.4
MESS67: H67.2 M8.5
MESS68: H68.2 M8.12
MESS69: H69.2 M8.13
MESS70: H70.2 M8.14
MESS71: H71.2 M8.15
MESS72: H72.2 M9.1
MESS73: H73.2 M9.2
MESS74: H74.2 M9.4
MESS75: H75.2 M9.5
MESS76: H76.2 M9.12
MESS77: H77.2 M9.13
MESS78: H78.2 M9.14
MESS79: H79.2 M9.15
MESS80: H80.2 M10.1
MESS81: H81.2 M10.2
MESS82: H82.2 M10.4
MESS83: H83.2 M10.5
MESS84: H84.2 M10.12
MESS85: H85.2 M10.13
MESS86: H86.2 M10.14
MESS87: H87.2 M10.15
MESS88: H88.2 M11.1
MESS89: H89.2 M11.2
MESS90: H90.2 M11.4
MESS91: H91.2 M11.5
MESS92: H92.2 M11.12
MESS93: H93.2 M11.13
MESS94: H94.2 M11.14
MESS95: H95.2 M11.15
MESS96: H96.2 M12.1
MESS97: H97.2 M12.2
MESS98: H98.2 M12.4
MESS99: H99.2 M12.5
MESS100: H100.2 M12.12
MESS101: H101.2 M12.13
MESS102: H102.2 M12.14
MESS103: H103.2 M12.15
MESS104: H104.2 M13.1
MESS105: H105.2 M13.2
MESS106: H106.2 M13.4
MESS107: H107.2 M13.5
MESS108: H108.2 M13.12
MESS109: H109.2 M13.13
MESS110: H110.2 M13.14
MESS111: H111.2 M13.15
MUX0: JP2.7 M0.11 M1.11 M2.11 M3.11 M4.11 M5.11 M6.11 M7.11 M8.11 M9.11 M10.11 M11.11 M12.11 M13.11
MUX1: JP2.8 M0.10 M1.10 M2.10 M3.10 M4.10 M5.10 M6.10 M7.10 M8.10 M9.10 M10.10 M11.10 M12.10 M13.10
MUX2: JP2.9 M0.9 M1.9 M2.9 M3.9 M4.9 M5.9 M6.9 M7.9 M8.9 M9.9 M10.9 M11.9 M12.9 M13.9
MUX3: JP2.10 M14.11 M15.11
MUX4: JP2.11 M14.10 M15.10
MUX5: JP2.12 M14.9 M15.9
N$25: JP1.2 SJ1.1

## Tracks (layer width: path | path; a pad name or v marks a point on that pad's centre or on a via)
5V  (1 unrouted)
+3V3  (312 unrouted)
  pour Bottom (isolate 0.406): -11.43,165.74 337.19,165.74 334.01,-3.81 -4.45,-5.08
CONTROL0  (1 unrouted)
CONTROL1  (1 unrouted)
DATA0  (1 unrouted)
DATA1  (1 unrouted)
DATA2  (1 unrouted)
DATA3  (1 unrouted)
DATA4  (1 unrouted)
DATA5  (1 unrouted)
GND  (321 unrouted)
  pour Top (isolate 0.406): 335.92,163.83 334.64,-2.54 -5.08,-6.35 -6.99,160.66
M0  (1 unrouted)
M1  (1 unrouted)
M2  (1 unrouted)
M3  (1 unrouted)
M4  (1 unrouted)
M5  (1 unrouted)
M6  (1 unrouted)
M7  (1 unrouted)
M8  (1 unrouted)
M9  (1 unrouted)
M10  (1 unrouted)
M11  (1 unrouted)
M12  (1 unrouted)
M13  (1 unrouted)
M14  (1 unrouted)
M15  (1 unrouted)
MESS0  (2 unrouted)
MESS1  (2 unrouted)
MESS2  (2 unrouted)
MESS3  (2 unrouted)
MESS4  (2 unrouted)
MESS5  (2 unrouted)
MESS6  (2 unrouted)
MESS7  (2 unrouted)
MESS8  (2 unrouted)
MESS9  (2 unrouted)
MESS10  (2 unrouted)
MESS11  (2 unrouted)
MESS12  (2 unrouted)
MESS13  (2 unrouted)
MESS14  (2 unrouted)
MESS15  (2 unrouted)
MESS16  (2 unrouted)
MESS17  (2 unrouted)
MESS18  (2 unrouted)
MESS19  (2 unrouted)
MESS20  (2 unrouted)
MESS21  (2 unrouted)
MESS22  (2 unrouted)
MESS23  (2 unrouted)
MESS24  (2 unrouted)
MESS25  (2 unrouted)
MESS26  (2 unrouted)
MESS27  (2 unrouted)
MESS28  (2 unrouted)
MESS29  (2 unrouted)
MESS30  (2 unrouted)
MESS31  (2 unrouted)
MESS32  (3 unrouted)
MESS33  (3 unrouted)
MESS34  (3 unrouted)
MESS35  (3 unrouted)
MESS36  (3 unrouted)
MESS37  (3 unrouted)
MESS38  (3 unrouted)
MESS39  (3 unrouted)
MESS40  (3 unrouted)
MESS41  (3 unrouted)
MESS42  (3 unrouted)
MESS43  (3 unrouted)
MESS44  (3 unrouted)
MESS45  (3 unrouted)
MESS46  (3 unrouted)
MESS47  (3 unrouted)
MESS48  (3 unrouted)
MESS49  (3 unrouted)
MESS50  (3 unrouted)
MESS51  (3 unrouted)
MESS52  (3 unrouted)
MESS53  (3 unrouted)
MESS54  (3 unrouted)
MESS55  (3 unrouted)
MESS56  (1 unrouted)
MESS57  (1 unrouted)
MESS58  (1 unrouted)
MESS59  (1 unrouted)
MESS60  (1 unrouted)
MESS61  (1 unrouted)
MESS62  (1 unrouted)
MESS63  (1 unrouted)
MESS64  (1 unrouted)
MESS65  (1 unrouted)
MESS66  (1 unrouted)
MESS67  (1 unrouted)
MESS68  (1 unrouted)
MESS69  (1 unrouted)
MESS70  (1 unrouted)
MESS71  (1 unrouted)
MESS72  (1 unrouted)
MESS73  (1 unrouted)
MESS74  (1 unrouted)
MESS75  (1 unrouted)
MESS76  (1 unrouted)
MESS77  (1 unrouted)
MESS78  (1 unrouted)
MESS79  (1 unrouted)
MESS80  (1 unrouted)
MESS81  (1 unrouted)
MESS82  (1 unrouted)
MESS83  (1 unrouted)
MESS84  (1 unrouted)
MESS85  (1 unrouted)
MESS86  (1 unrouted)
MESS87  (1 unrouted)
MESS88  (1 unrouted)
MESS89  (1 unrouted)
MESS90  (1 unrouted)
MESS91  (1 unrouted)
MESS92  (1 unrouted)
MESS93  (1 unrouted)
MESS94  (1 unrouted)
MESS95  (1 unrouted)
MESS96  (1 unrouted)
MESS97  (1 unrouted)
MESS98  (1 unrouted)
MESS99  (1 unrouted)
MESS100  (1 unrouted)
MESS101  (1 unrouted)
MESS102  (1 unrouted)
MESS103  (1 unrouted)
MESS104  (1 unrouted)
MESS105  (1 unrouted)
MESS106  (1 unrouted)
MESS107  (1 unrouted)
MESS108  (1 unrouted)
MESS109  (1 unrouted)
MESS110  (1 unrouted)
MESS111  (1 unrouted)
MUX0  (14 unrouted)
MUX1  (14 unrouted)
MUX2  (14 unrouted)
MUX3  (2 unrouted)
MUX4  (2 unrouted)
MUX5  (2 unrouted)
N$25  (1 unrouted)

## Text on the board
tPlace: 40 | 40 | 40 | 40 | 40 | 40 | 40 | 40 | 40 | 40 | 40 | 40 | 40 | 40 | 40 | 40 | 40 | 40 | 40 | 40 | 40 | 40 | 40 | 40 | 40 | 40 | 40 | 40 | 40 | 40 | 40 | 40 | 40 | 40 | 40 | 40 | 40 | 40 | 40 | 40 | 40 | 40 | 40 | 40 | 40 | 40 | 40 | 40 | 40 | 40 | 40 | 40 | 40 | 40 | 40 | 40 | 180 | 180 | 180 | 180 | 180 | 180 | 180 | 180 | 48 | 48 | 48 | 48 | 48 | 48 | 180 | 180 | 180 | 180 | 180 | 180 | 180 | 180 | 48 | 48 | 48 | 48 | 48 | 48 | 180 | 180 | 180 | 180 | 180 | 180 | 180 | 180 | 48 | 48 | 48 | 48 | 48 | 48 | 180 | 180 | 180 | 180 | 180 | 180 | 180 | 180 | 48 | 48 | 48 | 48 | 48 | 48